# Altium PCB LR_EVM.PcbDoc
Units mm, origin at the board's own origin, x right, y up, seen from the top; angles counter-clockwise.
Board outline 90 x 62 mm, 2 copper layers (Top Layer, Bottom Layer), stack 1.571 mm thick; 63 components, 61 nets, 292 pads, 411 vias.
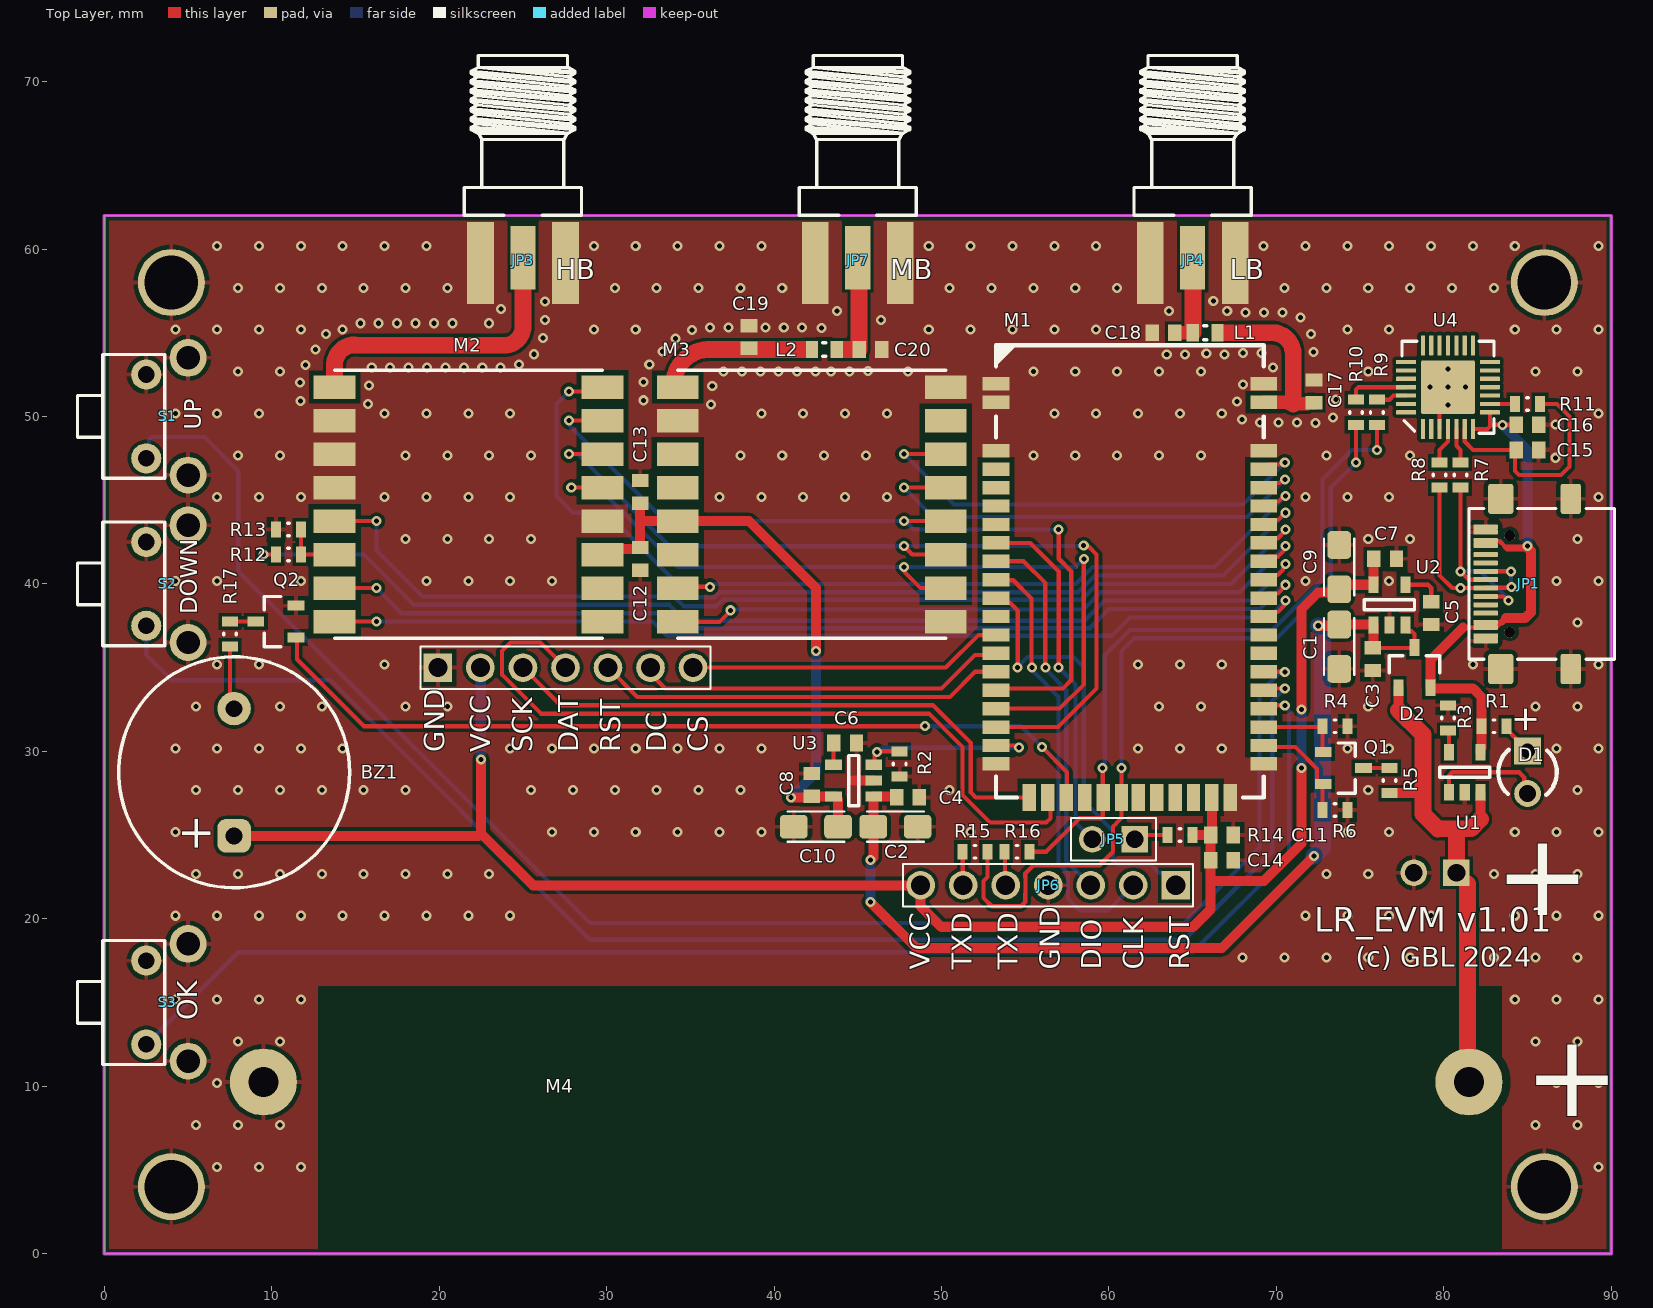
[diagram p0: Top Layer view]
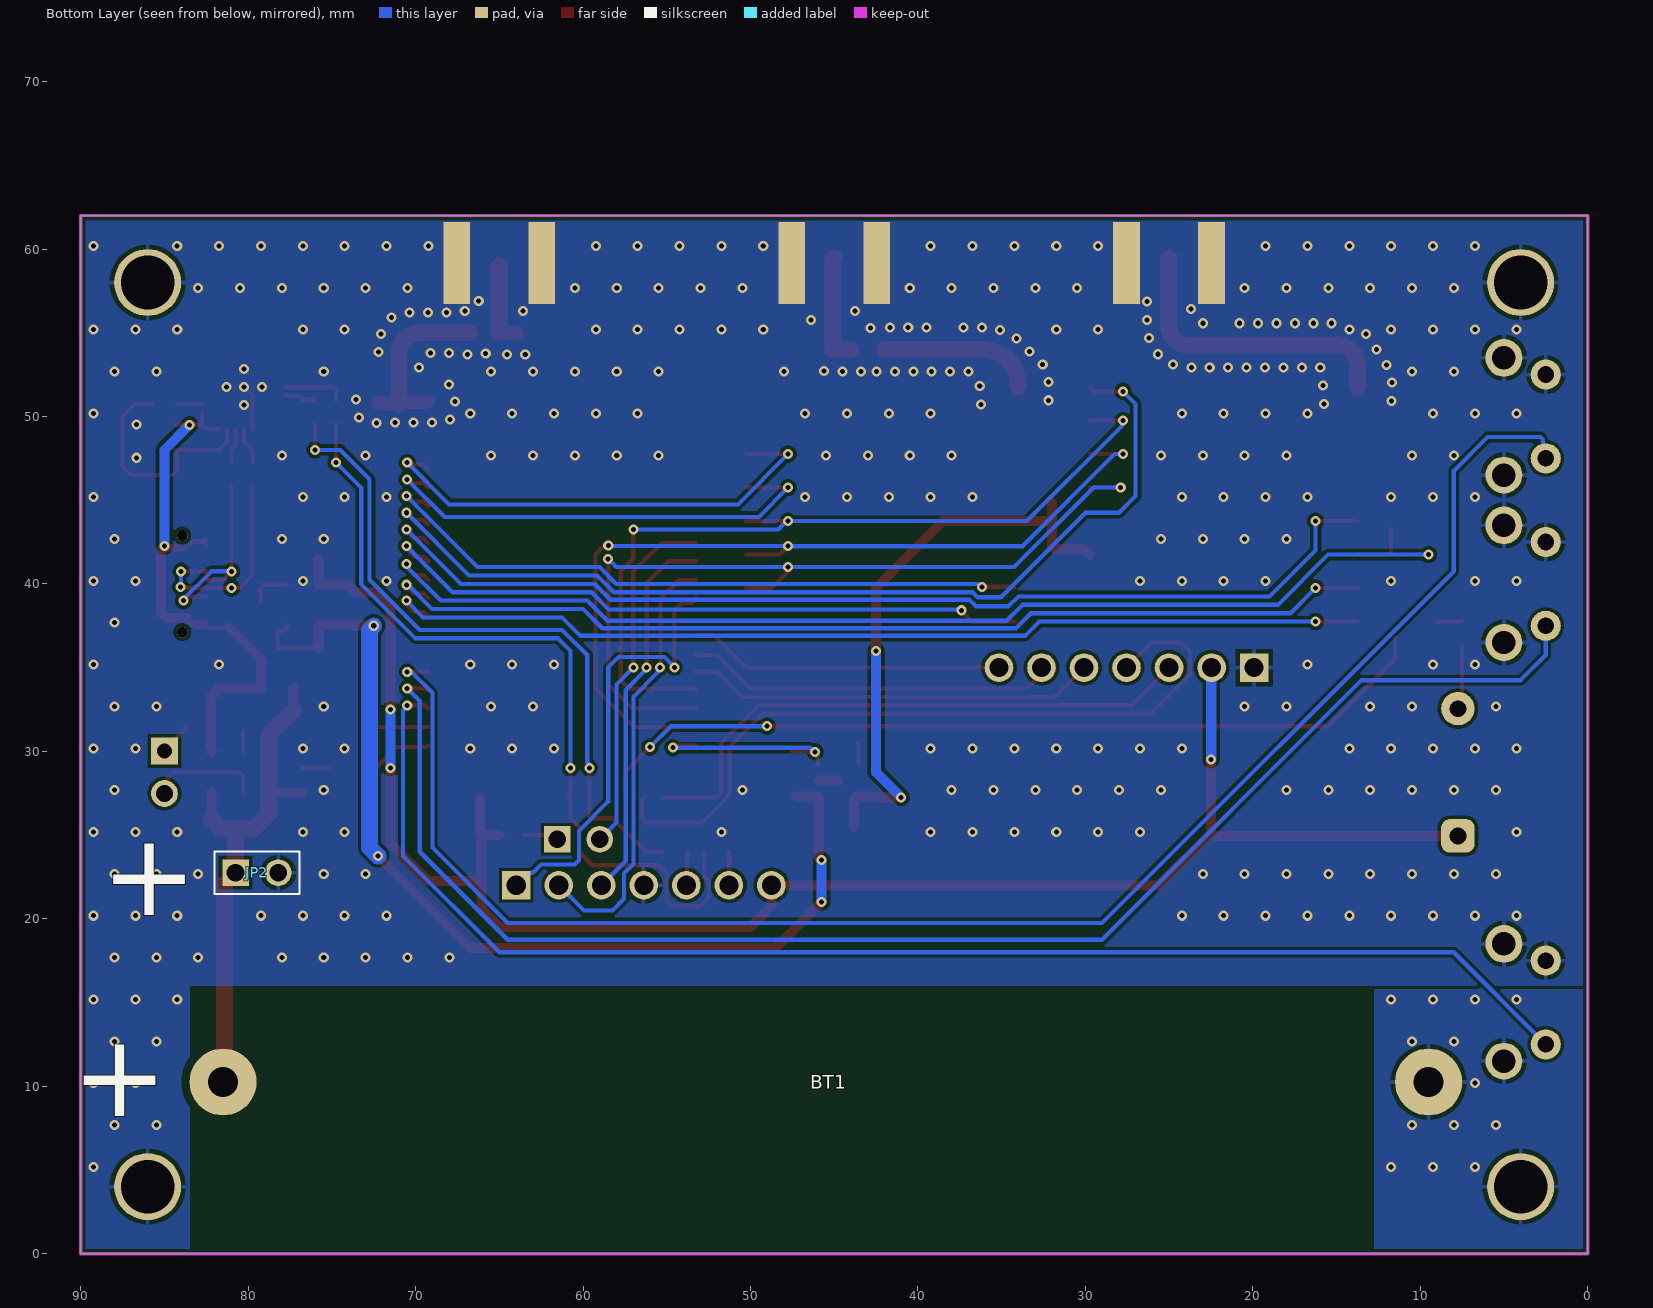
[diagram p1: Bottom Layer view, seen from below]
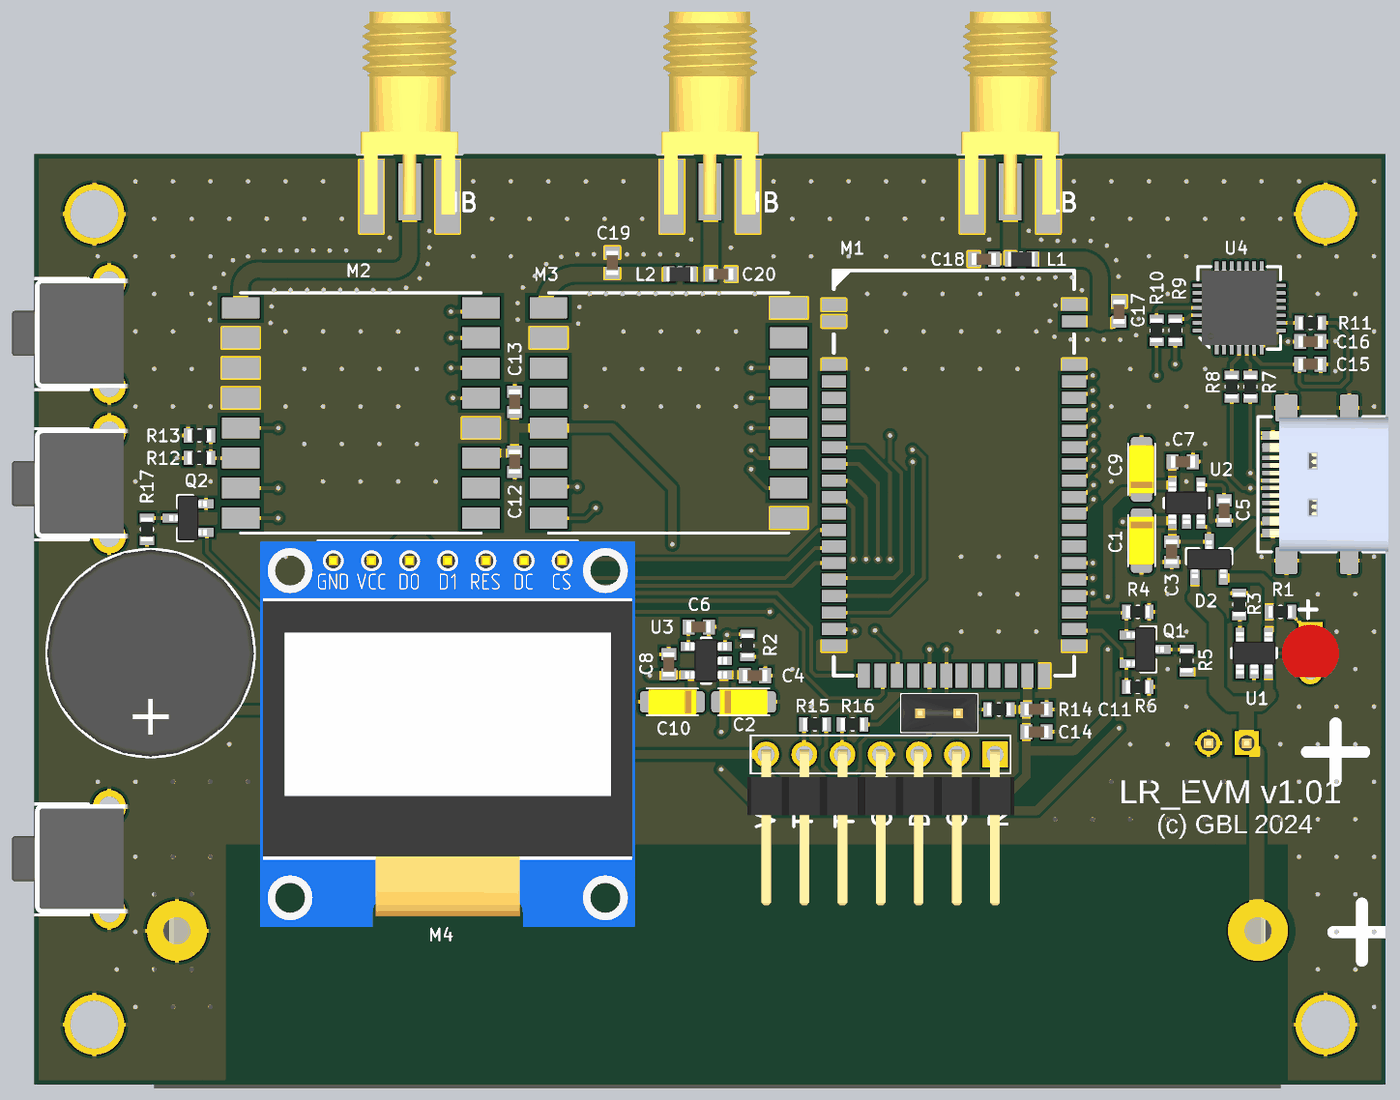
[diagram p2: 3D render of the assembled board from above, using the file's embedded part models]

## Layer stack, top to bottom
Top Solder: solder mask 0.0102, Solder Resist, Dk 3.5
Top Layer: signal copper 0.0356
Dielectric 1: dielectric 1.5, FR-4, Dk 4.8
Bottom Layer: signal copper 0.0356
Bottom Solder: solder mask 0.0102, Solder Resist, Dk 3.5

## Board outline
0,0 0,62 90,62 90,0

## Design rules (kind name [scope] priority, off if disabled: settings)
Clearance Clearance_2 [InNamedPolygon('GND_L01_P005') Or InNamedPolygon('GND_L01_P006') Or InNamedPolygon('GND_L02_P002') Or InNamedPolygon('GND_L02_P003') vs InNet('VBAT')] p1: gap=0.5 ignorepadtopadclearanceinfootprint=FALSE
Clearance Clearance_1 [InNamedPolygon('GND_L01_P001') vs InComponent('M1') or InComponent('M2') or InComponent('M3')] p2: gap=0.3 ignorepadtopadclearanceinfootprint=FALSE
Clearance [All] p3: gap=0.2 ignorepadtopadclearanceinfootprint=FALSE
HoleSize [All] p1: absolutevalues=TRUE maxlimit=5 minlimit=0.025 maxpercent=80.000 minpercent=20.000
MinimumSolderMaskSliver [All] p1: minsoldermaskwidth=0.02
PolygonConnect PolygonConnect_5 [All vs IsNamedPolygon('GND_L01_P005') Or IsNamedPolygon('GND_L01_P006') Or IsNamedPolygon('GND_L02_P002') Or IsNamedPolygon('GND_L02_P003')] p1: thpad.connectstyle=Relief thpad.reliefconductorwidth=0.254 thpad.reliefentries=4 thpad.polygonreliefangle="90 Angle" thpad.airgapwidth=0.254 smdpad.connectstyle=Relief smdpad.reliefconductorwidth=0.254 smdpad.reliefentries=4 smdpad.polygonreliefangle="90 Angle" smdpad.airgapwidth=0.254 via.connectstyle=Direct via.reliefconductorwidth=0.254 via.reliefentries=4 via.polygonreliefangle="90 Angle" via.airgapwidth=0.254
PolygonConnect PolygonConnect_4 [InComponent('JP3') or InComponent('JP4') or InComponent('JP7') vs IsNamedPolygon('GND_L02_P000')] p2: thpad.connectstyle=Relief thpad.reliefconductorwidth=0.254 thpad.reliefentries=4 thpad.polygonreliefangle="90 Angle" thpad.airgapwidth=0.254 smdpad.connectstyle=Direct smdpad.reliefconductorwidth=0.254 smdpad.reliefentries=4 smdpad.polygonreliefangle="90 Angle" smdpad.airgapwidth=0.254 via.connectstyle=Relief via.reliefconductorwidth=0.254 via.reliefentries=4 via.polygonreliefangle="90 Angle" via.airgapwidth=0.254
PolygonConnect PolygonConnect_2 [InComponent('JP3') or InComponent('JP4') or InComponent('JP7') or InComponent('M1') or InComponent('M2') or InComponent('M3') vs IsNamedPolygon('GND_L01_P001')] p3: thpad.connectstyle=Relief thpad.reliefconductorwidth=0.254 thpad.reliefentries=4 thpad.polygonreliefangle="90 Angle" thpad.airgapwidth=0.254 smdpad.connectstyle=Direct smdpad.reliefconductorwidth=0.254 smdpad.reliefentries=4 smdpad.polygonreliefangle="90 Angle" smdpad.airgapwidth=0.254 via.connectstyle=Relief via.reliefconductorwidth=0.254 via.reliefentries=4 via.polygonreliefangle="90 Angle" via.airgapwidth=0.254
PolygonConnect PolygonConnect_3 [InComponent('C17')or InComponent('C18') or InComponent('C20') or InComponent('C19') vs IsNamedPolygon('GND_L01_P001')] p4: thpad.connectstyle=Relief thpad.reliefconductorwidth=0.254 thpad.reliefentries=4 thpad.polygonreliefangle="90 Angle" thpad.airgapwidth=0.254 smdpad.connectstyle=Direct smdpad.reliefconductorwidth=0.254 smdpad.reliefentries=4 smdpad.polygonreliefangle="90 Angle" smdpad.airgapwidth=0.254 via.connectstyle=Relief via.reliefconductorwidth=0.254 via.reliefentries=4 via.polygonreliefangle="90 Angle" via.airgapwidth=0.254
PolygonConnect PolygonConnect_1 [All vs IsNamedPolygon('GND_L01_P001') Or IsNamedPolygon('GND_L02_P000')] p5: thpad.connectstyle=Relief thpad.reliefconductorwidth=0.254 thpad.reliefentries=4 thpad.polygonreliefangle="90 Angle" thpad.airgapwidth=0.254 smdpad.connectstyle=Relief smdpad.reliefconductorwidth=0.254 smdpad.reliefentries=4 smdpad.polygonreliefangle="90 Angle" smdpad.airgapwidth=0.254 via.connectstyle=Direct via.reliefconductorwidth=0.254 via.reliefentries=4 via.polygonreliefangle="90 Angle" via.airgapwidth=0.254
PolygonConnect [All] p6: connectstyle=Relief reliefconductorwidth=0.254 reliefentries=4 polygonreliefangle="90 Angle" airgapwidth=0.254
RoutingVias [All] p1: holewidth=0.711 width=1.27 viastyle="Through Hole" minholewidth=0.711 minwidth=1.27 maxholewidth=0.711 maxwidth=1.27
SilkToSilkClearance [All] p1: silktosilkclearance=0.05
SilkToSolderMaskClearance [IsPad] p1: minsilkscreentomaskgap=0.02 clearancetoexposedcopper=TRUE
SolderMaskExpansion [All] p1: expansion=0.102 istentingtop=FALSE
Width [All] p1: maxlimit=3 minlimit=0.15 preferedwidth=0.25
26 further rules are at their usual default settings.

## Components (designator, comment, footprint, x,y, rotation, side; value= is the part's Value field where it differs from the comment)
BT1 "18650" 18650 45.5,10.25 r180 bottom
BZ1 "AZ-14M40" AZ-14M40 7.75,28.75 r90 top value={Value}
C1 "22u" C_TANTAL_A 73.75,36.25 r270 top
C2 "22u" C_TANTAL_A 47.25,25.5 r0 top
C3 "100n" C-0603 75.75,35.5 r270 top
C4 "100n" C-0603 48,27.25 r0 top
C5 "nc" C-0603 79.25,38.25 r270 top
C6 "nc" C-0603 44.25,30.5 r0 top
C7 "100n" C-0603 76.5,41.5 r0 top
C8 "100n" C-0603 42.25,28 r90 top
C9 "22u" C_TANTAL_A 73.75,41 r90 top
C10 "22u" C_TANTAL_A 42.5,25.5 r180 top
C11 "1u" C-0603 66.75,25 r0 top
C12 "1n" C-0603 32,41.5 r270 top
C13 "1u" C-0603 32,45.5 r90 top
C14 "1n" C-0603 66.75,23.5 r0 top
C15 "100n" C-0603 85,48 r0 top
C16 "100n" C-0603 85,49.5 r180 top
C17 "nc" C-0603 72.25,51.5 r90 top
C18 "nc" C-0603 63.25,55 r180 top
C19 "nc" C-0603 38.5,54.75 r90 top
C20 "nc" C-0603 45.75,54 r0 top
D1 "DLED" LED_3mm_RED 85,28.75 r270 top
D2 "BAT54C" SOT-23 78.25,35 r90 top
JP1 "L-KLS1-5473" L-KLS1-5473 82.5,40 r90 top
JP2 "HEADER 2" PLS1-2 80.75,22.75 r180 bottom
JP3 "EM-SA071-GGT" SMA_F_EDGE 25,60.75 r270 top locked
JP4 "EM-SA071-GGT" SMA_F_EDGE 65,60.75 r270 top locked
JP5 "HEADER 2" PLS1-2 61.54,24.75 r180 top
JP6 "Header 7" PLS1-7R 63.99,22 r180 top
JP7 "EM-SA071-GGT" SMA_F_EDGE 45,60.75 r270 top locked
L1 "0" L-0603 65.75,55 r180 top
L2 "0" L-0603 43,54 r0 top
M1 "E78-400M22S1C" E78_400_M22S1C 61.25,40.25 r0 top locked
M2 "LORA1280" LGA16_LORA1280 21.75,44.75 r180 top locked
M3 "LORA1262-868" LGA16_LORA1280 42.25,44.75 r180 top locked
M4 "OLED0_96" OLED096 19.92,35 r0 top
Q1 "MOSF-N" SOT-23 74,29 r0 top
Q2 "MMUN2211" SOT-23 10.25,37.75 r180 top
R1 "RES" R-0603 83,31.5 r0 top
R2 "100k" R-0603 47.5,29.25 r90 top
R3 "2k" R-0603 80.25,32 r270 top
R4 "1M" R-0603 73.5,31.5 r0 top
R5 "100k" R-0603 76.75,28.25 r90 top
R6 "10k" R-0603 73.5,26.5 r0 top
R7 "22" R-0603 81,46.5 r270 top
R8 "22" R-0603 79.75,46.5 r270 top
R9 "1k" R-0603 76,50.25 r90 top
R10 "1k" R-0603 74.75,50.25 r90 top
R11 "10k" R-0603 85,50.75 r180 top
R12 "0" R-0603 11,41.75 r180 top
R13 "nc" R-0603 11,43.25 r180 top
R14 "1k" R-0603 64.25,25 r180 top
R15 "1k" R-0603 52,24 r0 top
R16 "1k" R-0603 54.5,24 r0 top
R17 "RES" R-0603 7.5,37 r90 top
S1 "KLS7-TS3602 -3 15-180" KLS7-TS3602 2.5,50 r270 top locked
S2 "KLS7-TS3602 -3 15-180" KLS7-TS3602 2.5,40 r270 top locked
S3 "KLS7-TS3602 -3 15-180" KLS7-TS3602 2.5,15 r270 top locked
U1 "MCP73831-2ATI/OT" SOT-23-5 81.25,28.75 r90 top
U2 "NCP551SN33LT1G" SOT-23-5 76.75,38.75 r90 top
U3 "NCP551SN33LT1G" SOT-23-5 44.75,28.25 r180 top
U4 "CP2102" QFN28 80.25,51.75 r90 top value={Value}

## Footprints (in the part's own frame and the unit in brackets; to place one, negate y for a bottom-side part, rotate by r counter-clockwise, add the part's x,y. Pads: shape width x height; smd on the part's side, far side on the other; paste and mask are expansions set on the pad)
18650 [mm]
  round 4 hole 1.8: 1(-36,0) 2(36,0)
  body extent -37.5,-10.5 37.5,10.5, height 21
AZ-14M40 [mm]
  rrect50% 2x2 hole 1: 1(-3.8,0)
  round 2 hole 1: 2(3.8,0)
  silkscreen extent -6.9,-6.9 6.9,6.9, body extent -6.89,-6.9 6.89,6.9, height 5.8
C-0603 [mm] "Chip Capacitor, 2-Leads, Body 1,60x0,80mm, IPC Medium Density"
  rect 0.8x1 smd: 1(-0.675,0) 2(0.675,0)
  body extent -0.8,-0.4 0.8,0.4, height 0.8
C_TANTAL_A [mm] "Capacitor, Polarized, Molded Body; 3.20 mm L X 1.65 mm W X 1.80 mm H body"
  rrect35% 1.66x1.42 smd: 1(1.325,0) 2(-1.325,0)
  silkscreen extent -1.7,-0.9 1.7,0.9, body extent -1.6,-0.82 1.6,0.82, height 1.8
E78_400_M22S1C [mm]
  rect 1.6x0.8 smd: 1(-8,11.7) 2(-8,10.6) 3(-8,7.7) 4(-8,6.6) 5(-8,5.5) 6(-8,4.4) 7(-8,3.3) 8(-8,2.2) 9(-8,1.1) 10(-8,0) 11(-8,-1.1) 12(-8,-2.2) 13(-8,-3.3) 14(-8,-4.4) 15(-8,-5.5) 16(-8,-6.6) 17(-8,-7.7) 18(-8,-8.8) 19(-8,-9.9) 20(-8,-11) 33(8,-11) 34(8,-9.9) 35(8,-8.8) 36(8,-7.7) 37(8,-6.6) 38(8,-5.5) 39(8,-4.4) 40(8,-3.3) 41(8,-2.2) 42(8,-1.1) 43(8,0) 44(8,1.1) 45(8,2.2) 46(8,3.3) 47(8,4.4) 48(8,5.5) 49(8,6.6) 50(8,7.7) 51(8,10.6) 52(8,11.7)
  rect 0.8x1.6 smd: 21(-6,-13) 22(-4.9,-13) 23(-3.8,-13) 24(-2.7,-13) 25(-1.6,-13) 26(-0.5,-13) 27(0.5,-13) 28(1.6,-13) 29(2.7,-13) 30(3.8,-13) 31(4.9,-13) 32(6,-13)
  silkscreen extent -8,-13 8,14, body extent -8,-13 8,13, height 2.8
KLS7-TS3602 [mm] "miniature switch"
  round 1.8 hole 1: 1(-2.5,0) 2(2.5,0)
  oval 2.25x2.2 hole 1.4: 3(-3.5,2.5)
  round 2.2 hole 1.4: 3(3.5,2.5)
  silkscreen extent -3.7,-4.1 3.7,1.1, body extent -3.7,-3.97 3.6,3.75, height 4.4
L-0603 [mm] "Chip Inductor, 2-Leads, Body 1,60x0,80mm, IPC Medium Density"
  rect 0.74x1.02 smd: 1(-0.735,0) 2(0.735,0)
  silkscreen extent -0.1,-0.41 0.1,0.41, body extent -0.9,-0.5 0.9,0.5, height 1
L-KLS1-5473 [mm] "USB 3.1 Type C"
  rrect20% 1.8x1.2 smd mask+0.07: 1(-5.08,-5.08) 1(5.08,-5.08)
  rrect20% 1.8x1.5 smd mask+0.07: 1(-5.08,-0.9) 1(5.08,-0.9)
  rrect30% 0.3x1.45 smd paste-2 mask+0.07: A1(-3.1,0) A4(-2.6,0) A9(2.6,0) A12(3.4,0) B1(3.1,0) B4(2.3,0) B9(-2.3,0) B12(-3.4,0)
  rrect30% 0.3x1.45 smd mask+0.07: A5(-1.25,0) A6(-0.25,0) A7(0.25,0) A8(1.25,0) B5(1.75,0) B6(0.75,0) B7(-0.75,0) B8(-1.75,0)
  round 0.65 hole 0.65 unplated paste-2539.97 mask+0.07: MH(-2.885,-1.44) MH(2.885,-1.44)
  silkscreen extent -4.5,-7.69 4.5,1, body extent -4.47,-7.7 4.47,0.2, height 3.2
LED_3mm_RED [mm]
  rect 1.6x1.6 hole 0.9: 1(-1.27,0)
  round 1.6 hole 1: 2(1.27,0)
  silkscreen extent -1.34,-1.75 1.34,1.75, body extent -1.9,-1.9 1.6,1.9, height 5.75
LGA16_LORA1280 [mm]
  rect 2.5x1.4 smd: 1(-8,7) 2(-8,5) 3(-8,3) 4(-8,1) 5(-8,-1) 6(-8,-3) 7(-8,-5) 8(-8,-7) 9(8,-7) 10(8,-5) 11(8,-3) 12(8,-1) 13(8,1) 14(8,3) 15(8,5) 16(8,7)
  silkscreen extent -8,-8 8,8, body extent -7.5,-7.51 7.5,7.51, height 1.5
OLED096 [mm] "Header, Vertical, 2.54 mm pitch; 0.70 mm lead width, 7 pins, 1 row, 7 pins per row, 16.51 mm L X 2.54 mm W X 7.54 mm H body"
  rect 1.71x1.71 hole 1.14 paste-2539.97: 1(0,0)
  round 1.71 hole 1.14 paste-2539.97: 2(2.54,0) 3(5.08,0) 4(7.62,0) 5(10.16,0) 6(12.7,0) 7(15.24,0)
  silkscreen extent -1.04,-1.27 16.28,1.27, body extent -4.88,-24.5 20.12,1.2, height 6.54
PLS1-2 [mm] "Header, Vertical, 2.54 mm pitch; 0.64 mm lead width, 2 pins, 1 row, 2 pins per row, 5.08 mm L X 2.54 mm W X 8.54 mm H body"
  rect 1.59x1.59 hole 1.06 paste-2539.97: 1(0,0)
  round 1.59 hole 1.06 paste-2539.97: 2(2.54,0)
  silkscreen extent -1.27,-1.27 3.81,1.27, body extent -1.27,-1.27 3.81,1.27, height 8.54
PLS1-7R [mm] "Header, Vertical, 2.54 mm pitch; 0.70 mm lead width, 7 pins, 1 row, 7 pins per row, 16.51 mm L X 2.54 mm W X 7.54 mm H body"
  rect 1.71x1.71 hole 1.14 paste-2539.97: 1(0,0)
  round 1.71 hole 1.14 paste-2539.97: 2(2.54,0) 3(5.08,0) 4(7.62,0) 5(10.16,0) 6(12.7,0) 7(15.24,0)
  silkscreen extent -1.04,-1.27 16.28,1.27, body extent -1.27,-0.32 16.51,10.04, height 2.54
QFN28 [mm]
  rrect20% 1.2x0.25 smd: 1(-2.5,1.5) 2(-2.5,1) 3(-2.5,0.5) 4(-2.5,0) 5(-2.5,-0.5) 6(-2.5,-1) 7(-2.5,-1.5) 15(2.5,-1.5) 16(2.5,-1) 17(2.5,-0.5) 18(2.5,0) 19(2.5,0.5) 20(2.5,1) 21(2.5,1.5)
  rrect20% 0.25x1.2 smd: 8(-1.5,-2.5) 9(-1,-2.5) 10(-0.5,-2.5) 11(0,-2.5) 12(0.5,-2.5) 13(1,-2.5) 14(1.5,-2.5) 22(1.5,2.5) 23(1,2.5) 24(0.5,2.5) 25(0,2.5) 26(-0.5,2.5) 27(-1,2.5) 28(-1.5,2.5)
  rrect5% 3.2x3.2 smd paste-4: 29(0,0)
  silkscreen extent -2.75,-2.75 2.75,2.75, body extent -2.5,-2.5 2.5,2.5, height 1
R-0603 [mm] "Chip Resistor, 2-Leads, Body 1,60x0,82mm, IPC Medium Density"
  rect 0.6x0.95 smd: 1(-0.75,0) 2(0.75,0)
  silkscreen extent -0.05,-0.38 0.05,0.38, body extent -0.8,-0.4 0.8,0.4, height 0.45
SMA_F_EDGE [mm] "SMA End Launch Jack for 1.58mm PCB, 50 Ohm, Flat Tab Contact"
  rect 3.81x1.5 smd: 1(1.27,0)
  rect 4.9x1.6 smd: 2(1.575,2.54) 2(1.575,-2.54)
  rect 4.9x1.6 smd far side: 2(1.575,2.54) 2(1.575,-2.54)
  silkscreen extent -10.81,-3.5 -1.28,3.5, body extent -10.73,-3.25 2.77,3.25, height 3.7
SOT-23 [mm]
  rect 1x0.6 smd: 1(-1.2,0.95) 2(-1.2,-0.95) 3(1.2,0)
  silkscreen extent -0.3,-1.5 0.7,1.5, body extent -1.25,-1.5 1.25,1.5, height 1.2
SOT-23-5 [mm] "SOT23, 5-Leads, Body 2,90x2,45mm, Pitch 0,95mm, IPC Medium Density"
  rect 1x0.6 smd: 1(-1.2,0.95) 2(-1.2,0) 3(-1.2,-0.95) 4(1.2,-0.95) 5(1.2,0.95)
  silkscreen extent -0.3,-1.5 0.3,1.5, body extent -1.4,-1.45 1.4,1.45, height 1.55

## Part data
BT1: library part Battery, "Multicell Battery", LatestRevisionDate=17-Jul-2002, LatestRevisionNote="Re-released for DXP Platform.", PackageDescription="Battery; 2 Leads", PackageReference=BAT-2, Published=24-Mar-1999, Publisher="Altium Limited"
BZ1: library part BUZ-AZ-14M40, Mounting  Method=THT
C1 C2 C9 C10: library part CAPP, Voltage=16V, Вид=Конденсатор
C3 C4 C5 C6 C7 C8 C11 C12 C13 C14 C15 C16 C17 C18 C19 C20: library part CAPN, Voltage=50V, Вид=Конденсатор, Точність/група=NP0
JP3 JP4 JP7: library part SMA, "SMA Female R/A PCB Mount", Вид=Роз'єм
JP6: "Header, 7-Pin", LatestRevisionDate=17-Jul-2002, LatestRevisionNote="Re-released for DXP Platform.", Publisher="Altium Limited"
L1 L2: library part L, Вид=Індуктивність
M3: library part LORA1262
R2 R3 R4 R5 R6 R7 R8 R9 R10 R11 R12 R13 R14 R15 R16: library part RES, Вид=Резистор, Точність/група=5%
S1 S2 S3: library part SW-1, Вид=Кнопка
U1: library part MCP73831
U2 U3: library part LP2980, "50mA Low-Dropout Regulator", Вид=Мікросхема
D1: Вид=Світлодіод
D2: Вид=Діод
JP1 U4: Mounting  Method=SMD
JP2 JP5: Вид=Роз'єм
Q1 Q2: Вид=Транзистор
R1 R17: Вид=Резистор, Точність/група=5%

## Free pads (board coordinates)
  round 4 hole 3.2: 0(4,4) 0(4,58) 0(86,4) 0(86,58)

## Via types
v1: diameter 0.6, hole 0.3, Top Layer to Bottom Layer, tented both sides, 406 vias
v2: diameter 0.6, hole 0.3, Top Layer to Bottom Layer, 5 vias

## Nets (pads, with @x,y where several pads share a name; then routed paths per layer and width w, separated by ;. In a path a pad name is that pad's centre, name@x,y a point inside that pad or via, vN(x,y) a via of type N, cw(c..) or ccw(c..) an arc to the next point about the centre after c; other vN are vias at no path point)
\: M1.36 S3.2 | length 83.3
  Top Layer w0.25: M1.36 69.45,32.75 v1(70.5,32.75)
  Bottom Layer w0.25: S3.2 8,18 65,18 70.75,23.75 70.75,32.429 70.5,32.679 v1(70.5,32.75)
BATT_LEVEL: M1.34 Q1.2 R6.1 | length 6.5
  Top Layer w0.25: M1.34 69.35,30.25 71.134,30.25 72.425,28.959 72.425,28.225 72.6,28.05 Q1.2 72.75,28 R6.1
BATT_MEAS: M1.35 Q1.1 R4.1 | length 5.1
  Top Layer w0.25: M1.35 72.7,31.45 R4.1 72.75,30 Q1.1
BOOT: JP5.2 M1.8 | length 21.3
  Top Layer w0.25: M1.8 55.3,42.45 57,40.75 v1(57,35)
  Bottom Layer w0.25: v1(57,35) 58,34 58,25.75 JP5.2
BUSY1262: M1.44 M3.16 | length 40
  Top Layer w0.25: M3.16 34.8,37.75 34.818,37.732 36.732,37.732 37.39,38.39 v1(37.39,38.425) ; M1.44 69.525,41.625 70.085,41.625 70.483,42.023 70.483,42.183 v1(70.55,42.25)
  Bottom Layer w0.25: v1(37.39,38.425) 37.434,38.469 58.469,38.469 59.5,39.5 67.8,39.5 v1(70.55,42.25)
BUSY1280: M1.42 M2.15 | length 60.5
  Top Layer w0.25: M2.15 v1(16.25,39.75) ; M1.42 69.525,39.425 70.085,39.425 70.555,39.895 v1(70.555,39.948)
  Bottom Layer w0.25: v1(16.25,39.75) 17.75,38.25 33.25,38.25 34.15,37.35 58.85,37.35 60,38.5 69.012,38.5 70.46,39.948 v1(70.555,39.948)
BUZZ: M1.23 Q2.1 | length 51.6
  Top Layer w0.25: Q2.1 11.5,36.75 11.5,35.5 15.5,31.5 v1(49,31.5) ; v1(56,30.25) 57.5,28.75 57.5,27.3 M1.23
  Bottom Layer w0.25: v1(49,31.5) 54.75,31.5 v1(56,30.25)
DM: JP1.A7 JP1.B7 R7.2 | length 11.8
  Top Layer w0.25: R7.2 v1(81,40.75) 81.5,40.25 JP1.A7 ; JP1.B7 83.551,39.25 83.805,38.997 v1(83.86,38.997)
  Bottom Layer w0.25: v1(81,40.75) 82.2,40.75 83.86,39.09 v1(83.86,38.997)
DOWN: M1.37 S2.2 | length 89.6
  Top Layer w0.25: M1.37 69.35,33.75 v1(70.5,33.75)
  Bottom Layer w0.25: S2.2 2.5,35.75 4,34.25 13.5,34.25 29,18.75 64.5,18.75 69.75,24 69.75,33 v1(70.5,33.75)
DP: JP1.A6 JP1.B6 R8.2 | length 12.3
  Top Layer w0.25: R8.2 79.75,40.5 80.5,39.75 v1(81,39.75) JP1.A6 82.523,39.773 83.993,39.773 v1(84.03,39.811) ; JP1.B6 v1(84,40.75)
  Bottom Layer w0.25: v1(84,40.75) 84.015,40.735 84.015,39.826 v1(84.03,39.811)
EXTRF: M1.19 R2.2 U3.3 | length 12.3
  Top Layer w0.25: U3.3 46,29.25 46,29.75 46.25,30 R2.2 ; M1.19 54.65,30.35 v1@54.75,30.25
  Bottom Layer w0.25: v1(46.14,29.969) 46.212,29.969 46.462,30.219 v1(54.64,30.219)
GND: BT1.2 C1.1 C2.1 C3.2 C4.2 C5.2 C6.2 C7.2 C8.2 C9.1 C10.1 C11.2 C12.2 C13.2 C14.2 C15.2 C16.1 C17.2 C18.2 C19.2 C20.2 JP1.1 JP1.A1 JP1.A12 JP1.B1 JP1.B12 JP2.2 JP3.2 JP4.2 JP6.4 JP7.2 M1.1 M1.2 M1.3 M1.20 M1.32 M1.33 M1.50 M1.52 M2.4 M2.10 M2.11 M2.12 M3.1 M3.8 M3.10 M4.1 pad.0 Q2.2 R2.1 R3.1 R4.2 R6.2 R13.2 S1.1 S1.3 S2.1 S2.3 S3.1 S3.3 U1.2 U2.2 U3.2 U4.3 U4.29 | length 3.9
  Top Layer w0.25: U4.3 79.75,51.25 v2(80.25,51.75)
  Top Layer w0.6: 44.75,28.25 U3.2
  other v1: 6.737,5.181 9.237,5.181 11.737,5.181 89.237,5.181 5.487,7.681 7.987,7.681 10.487,7.681 85.487,7.681 87.987,7.681 6.737,10.181 86.737,10.181 89.237,10.181 7.987,12.681 10.487,12.681 85.487,12.681 87.987,12.681 4.237,15.181 6.737,15.181 9.237,15.181 11.737,15.181 84.237,15.181 86.737,15.181 89.237,15.181 67.987,17.681 70.487,17.681 72.987,17.681 75.487,17.681 77.987,17.681 82.987,17.681 85.487,17.681 87.987,17.681 4.237,20.181 6.737,20.181 9.237,20.181 11.737,20.181 14.237,20.181 16.737,20.181 19.237,20.181 21.737,20.181 24.237,20.181 71.737,20.181 74.237,20.181 76.737,20.181 79.237,20.181 84.237,20.181 86.737,20.181 89.237,20.181 5.487,22.681 7.987,22.681 10.487,22.681 12.987,22.681 15.487,22.681 17.987,22.681 20.487,22.681 22.987,22.681 72.987,22.681 75.487,22.681 82.987,22.681 85.487,22.681 87.987,22.681 4.237,25.181 26.737,25.181 29.237,25.181 31.737,25.181 34.237,25.181 36.737,25.181 39.237,25.181 51.737,25.181 74.237,25.181 76.737,25.181 84.237,25.181 86.737,25.181 89.237,25.181 5.487,27.681 7.987,27.681 10.487,27.681 12.987,27.681 15.487,27.681 17.987,27.681 25.487,27.681 27.987,27.681 30.487,27.681 32.987,27.681 35.487,27.681 37.987,27.681 50.487,27.681 75.487,27.681 87.987,27.681 4.237,30.181 6.737,30.181 9.237,30.181 11.737,30.181 14.237,30.181 24.237,30.181 26.737,30.181 29.237,30.181 31.737,30.181 34.237,30.181 36.737,30.181 39.237,30.181 61.737,30.181 64.237,30.181 66.737,30.181 74.237,30.181 76.737,30.181 86.737,30.181 89.237,30.181 5.487,32.681 10.487,32.681 12.987,32.681 17.987,32.681 20.487,32.681 62.987,32.681 65.487,32.681 75.487,32.681 85.487,32.681 87.987,32.681 6.737,35.181 9.237,35.181 16.737,35.181 61.737,35.181 64.237,35.181 66.737,35.181 81.737,35.181 89.237,35.181 87.987,37.681 4.237,40.181 6.737,40.181 11.737,40.181 19.237,40.181 21.737,40.181 24.237,40.181 26.737,40.181 71.737,40.181 76.737,40.181 86.737,40.181 89.237,40.181 17.987,42.681 20.487,42.681 22.987,42.681 25.487,42.681 75.487,42.681 77.987,42.681 87.987,42.681 6.737,45.181 9.237,45.181 11.737,45.181 16.737,45.181 19.237,45.181 21.737,45.181 24.237,45.181 36.737,45.181 39.237,45.181 41.737,45.181 44.237,45.181 46.737,45.181 71.737,45.181 74.237,45.181 76.737,45.181 89.237,45.181 86.657,47.533 7.987,47.681 10.487,47.681 17.987,47.681 20.487,47.681 22.987,47.681 25.487,47.681 37.987,47.681 40.487,47.681 42.987,47.681 45.487,47.681 55.487,47.681 57.987,47.681 60.487,47.681 62.987,47.681 65.487,47.681 72.987,47.681 77.987,47.681 86.657,49.533 72.332,49.618 69.033,49.643 70.133,49.635 71.233,49.635 67.948,49.827 73.385,49.938 4.237,50.181 6.737,50.181 9.237,50.181 16.737,50.181 19.237,50.181 21.737,50.181 24.237,50.181 39.237,50.181 41.737,50.181 44.237,50.181 46.737,50.181 56.737,50.181 59.237,50.181 61.737,50.181 64.237,50.181 66.737,50.181 89.237,50.181 36.226,50.713 15.741,50.748 67.643,50.884 11.708,50.935 32.204,50.967 73.557,51.025 36.307,51.81 15.807,51.846 68.01,51.921 11.693,52.035 32.193,52.067 7.987,52.681 10.487,52.681 47.987,52.681 55.487,52.681 57.987,52.681 60.487,52.681 62.987,52.681 65.487,52.681 75.487,52.681 85.487,52.681 87.987,52.681 36.976,52.683 38.076,52.683 39.176,52.683 40.276,52.683 41.376,52.683 42.476,52.683 43.409,52.683 44.509,52.683 45.609,52.711 15.971,52.933 17.071,52.933 18.171,52.933 19.271,52.933 20.371,52.933 21.471,52.933 22.571,52.933 23.671,52.933 69.785,52.92 12.016,53.087 24.758,53.098 32.545,53.109 64.551,53.695 66.91,53.69 25.668,53.716 63.451,53.703 65.812,53.75 68.006,53.785 69.106,53.785 72.215,53.837 33.332,53.878 12.615,54.009 34.108,54.657 26.211,54.673 13.238,54.916 72.056,54.925 35.09,55.154 4.237,55.181 6.737,55.181 9.237,55.181 11.737,55.181 14.237,55.181 29.237,55.181 31.737,55.181 49.237,55.181 51.737,55.181 54.237,55.181 56.737,55.181 59.237,55.181 74.237,55.181 76.737,55.181 84.237,55.181 86.737,55.181 89.237,55.181 42.844,55.289 36.178,55.317 37.278,55.317 39.478,55.317 40.578,55.317 41.678,55.317 15.286,55.567 16.386,55.567 17.486,55.567 18.586,55.567 19.686,55.567 20.786,55.567 22.986,55.567 46.392,55.754 26.317,55.768 71.434,55.901 70.361,56.203 68.161,56.215 69.261,56.215 43.758,56.308 63.596,56.307 67.064,56.289 23.683,56.418 26.317,56.868 66.23,56.891 7.987,57.681 10.487,57.681 12.987,57.681 15.487,57.681 17.987,57.681 20.487,57.681 30.487,57.681 32.987,57.681 35.487,57.681 37.987,57.681 40.487,57.681 50.487,57.681 52.987,57.681 55.487,57.681 57.987,57.681 60.487,57.681 70.487,57.681 72.987,57.681 75.487,57.681 77.987,57.681 80.487,57.681 82.987,57.681 6.737,60.181 9.237,60.181 11.737,60.181 14.237,60.181 16.737,60.181 19.237,60.181 29.237,60.181 31.737,60.181 34.237,60.181 36.737,60.181 39.237,60.181 49.237,60.181 51.737,60.181 54.237,60.181 56.737,60.181 59.237,60.181 69.237,60.181 71.737,60.181 74.237,60.181 76.737,60.181 79.237,60.181 81.737,60.181 84.237,60.181 89.237,60.181
  other v2: 80.25,50.675 79.175,51.75 81.3,51.75 80.25,52.825
INT1262: M1.47 M3.15 | length 40.1
  Top Layer w0.25: M3.15 34.326,39.826 v1(36.174,39.826) ; M1.47 69.525,44.925 70.127,44.925 70.443,45.242 v1(70.538,45.242)
  Bottom Layer w0.25: v1(36.174,39.826) 36.269,39.826 36.443,40 58.014,40 59.014,41 66.297,41 v1(70.538,45.242)
INT1280: M1.41 M2.16 | length 59.8
  Top Layer w0.25: M2.16 v1(16.25,37.75) ; M1.41 69.525,38.325 70.085,38.325 70.483,38.723 70.483,38.933 v1(70.55,39)
  Bottom Layer w0.25: v1(16.25,37.75) 32.75,37.75 33.6,36.9 60.15,36.9 61.25,38 69.55,38 v1(70.55,39)
MISO: M1.17 M2.5 M3.2 | length 51.2
  Top Layer w0.25: v1(27.887,45.75) M2.5 ; v1(47.75,41) 47.817,40.933 47.817,40.683 48.75,39.75 M3.2 ; M1.17 57.05,32.55 58.5,34 v1(58.5,41.489)
  Bottom Layer w0.25: v1(27.887,45.75) 29.5,45.75 34.25,41 v1(47.75,41) 58.011,41 v1(58.5,41.489)
MOSI: M1.18 M2.6 M3.3 | length 53.7
  Top Layer w0.25: v1(27.75,47.75) M2.6 ; v1(47.75,42.25) 48.25,41.75 M3.3 ; M1.18 56.95,31.45 59.254,33.754 59.254,41.76 58.791,42.223 58.56,42.223 v1(58.493,42.289)
  Bottom Layer w0.25: v1(27.75,47.75) 28.25,47.75 33.75,42.25 v1(47.75,42.25) 47.769,42.269 58.474,42.269 v1(58.493,42.289)
NetBZ1_2: BZ1.2 R17.1 | length 3.8
  Top Layer w0.25: R17.1 7.5,32.8 BZ1.2
NetC5_1: C5.1 U2.4 | length 2.5
  Top Layer w0.25: U2.4 79.05,39.95 79.25,39.75 C5.1
NetC6_1: C6.1 U3.4 | length 1.3
  Top Layer w0.25: U3.4 43.55,30.475 C6.1
NetC15_1: C15.1 R11.1 U4.6 | length 13.9
  Top Layer w0.25: U4.6 81.252,49.248 81.252,48.498 81.75,48 C15.1 84.25,47.925 84.25,46.75 84.5,46.5 87,46.5 87.5,47 87.5,50 86.75,50.75 R11.1
NetC17_1: C17.1 L1.1 M1.51 | length 11.4
  Top Layer w0.8: M1.51 70.65,50.85 70.75,50.75 71,50.75 71.841,50.75 71.916,50.825 C17.1
  Top Layer w1: L1.1@66.737,55 69.75,55 ; 70,55 69.75,55 ; 71,50.75 71,53.83 ; 71,53.75 ccw(c69.75,53.75) 69.75,55
NetC18_1: C18.1 JP4.1 L1.2 | length 5.1
  Top Layer w0.25: JP4.1@65,59 JP4.1@65.015,58.985
  Top Layer w0.8: C18.1 L1.2
  Top Layer w1: L1.2 JP4.1@65.015,58.985
NetC19_1: C19.1 L2.1 M3.9 | length 9.2
  Top Layer w1: M3.9@34,51.75 cw(c36.129,51.871) 36.008,54 C19.1@38.425,54 ; C19.1@38.575,54 L2.1@42,54
NetC20_1: C20.1 JP7.1 L2.2 | length 6.6
  Top Layer w1: L2.2@44,54 C20.1 45.075,59.405 JP7.1
NetD1_1: D1.1 R1.2 | length 2
  Top Layer w0.25: R1.2 83.75,31.325 84.327,30.748 84.327,30.693 D1.1
NetD1_2: D1.2 U1.1 | length 6.8
  Top Layer w0.25: U1.1 80.3,28.55 80.5,28.75 84.5,28.75 84.804,28.446 84.804,27.676 D1.2
NetJP3_1: JP3.1 M2.9 | length 18.3
  Top Layer w0.8: 13.75,53.15 cw(c14.55,53.148) 13.765,53.301 ; 15.138,54.259 ccw(c15.259,55.05) 15.256,54.25
  Top Layer w1: M2.9 13.75,53.15 ; 13.765,53.301 cw(c14.948,53.069) 15.138,54.259 ; 15.256,54.25 24,54.25 ccw(c23.875,55.375) 25,55.5 ; 25,55.25 JP3.1
NetJP5_1: JP5.1 R14.2 | length 2.1
  Top Layer w0.25: JP5.1 61.79,25 R14.2
NetJP6_5: JP6.5 R16.1 | length 2
  Top Layer w0.25: R16.1 53.79,23.96 53.79,22.04 JP6.5
NetJP6_6: JP6.6 R15.1 | length 2
  Top Layer w0.25: R15.1 51.27,23.98 51.27,22.02 JP6.6
NetM2_14: M2.14 R12.1 R13.1 | length 3.5
  Top Layer w0.25: R13.1 R12.1 M2.14
NetQ1_3: Q1.3 R5.2 | length 1.6
  Top Layer w0.25: Q1.3 R5.2
NetQ2_3: Q2.3 R17.2 | length 1.6
  Top Layer w0.25: R17.2 Q2.3
NetR3_2: R3.2 U1.5 | length 1.3
  Top Layer w0.25: R3.2 80.3,31.2 U1.5
NetR7_1: R7.1 U4.5 | length 2.1
  Top Layer w0.25: U4.5 80.75,48.25 81,48 R7.1
NetR8_1: R8.1 U4.4 | length 2.2
  Top Layer w0.25: R8.1 79.75,48 80.248,48.498 80.248,49.248 U4.4
NetR9_2: R9.2 U4.26 | length 1.9
  Top Layer w0.25: R9.2 76.75,51 77,51.25 U4.26
NetR10_2: R10.2 U4.25 | length 3.7
  Top Layer w0.25: R10.2 74.75,51.601 74.899,51.75 U4.25
NetR11_2: R11.2 U4.9 | length 1.5
  Top Layer w0.25: U4.9 R11.2
NRST: JP6.1 M1.11 | length 26.1
  Top Layer w0.25: M1.11 53.523,38.877 54.085,38.877 54.55,38.412 v1(54.55,35)
  Bottom Layer w0.25: v1(54.55,35) 54.55,35.037 55.14,35.627 57.873,35.627 58.5,35 58.5,27 60.25,25.25 60.25,23.5 60.5,23.25 62.5,23.25 63,22.75 63.113,22.75 63.135,22.728 63.262,22.728 JP6.1
NSS1262: M1.48 M3.5 | length 28.4
  Top Layer w0.25: v1(47.75,45.75) M3.5 ; M1.48 69.525,46.025 70.19,46.025 70.412,46.247 v1(70.507,46.247)
  Bottom Layer w0.25: v1(47.75,45.75) 49.5,44 68.26,44 v1(70.507,46.247)
NSS1280: M1.46 M2.8 | length 58.4
  Top Layer w0.25: v1(27.75,51.5) 29.5,51.5 M2.8 ; M1.46 69.525,43.825 70.085,43.825 70.51,44.25 v1(70.55,44.25)
  Bottom Layer w0.25: v1(27.75,51.5) 27,50.75 27,45.25 28,44.25 30,44.25 35.051,39.199 36.434,39.199 36.735,39.5 58.156,39.5 59.156,40.5 66.8,40.5 v1(70.55,44.25)
OLED_CS: M1.13 M4.7 | length 18.9
  Top Layer w0.25: M4.7 50.25,35 52.2,36.95 M1.13
OLED_DATA: M1.22 M4.4 | length 45.5
  Top Layer w0.25: M4.4 26.04,36.5 24.25,36.5 23.75,36 23.75,34.578 26.078,32.25 49.25,32.25 51.25,30.25 51.25,27.402 52.902,25.75 56.25,25.75 56.5,26 56.5,27.1 M1.22
OLED_DC: M1.14 M4.6 | length 22.2
  Top Layer w0.25: M4.6 32.62,34.63 33.5,33.75 50,33.75 52,35.75 53.15,35.75 M1.14
OLED_RST: M1.15 M4.5 | length 24.5
  Top Layer w0.25: M4.5 31.83,33.25 50.5,33.25 52,34.75 M1.15
OLED_SCK: M1.21 M4.3 | length 35.2
  Top Layer w0.25: M4.3 27.25,32.75 49.5,32.75 51.75,30.5 51.75,27.544 52.044,27.25 M1.21
RST1262: M1.49 M3.6 | length 28.9
  Top Layer w0.25: v1(47.75,47.75) M3.6 ; M1.49 69.525,47.125 70.28,47.125 70.405,47.25 v1(70.5,47.25)
  Bottom Layer w0.25: v1(47.75,47.75) 50.75,44.75 68,44.75 v1(70.5,47.25)
RST1280: M1.45 M2.13 | length 63.5
  Top Layer w0.25: M2.13 v1(16.25,43.75) ; M1.45 69.525,42.725 70.085,42.725 70.55,43.19 v1(70.55,43.25)
  Bottom Layer w0.25: v1(16.25,43.75) 16.25,42 19,39.25 34,39.25 34.581,38.669 36.546,38.669 36.927,39.05 58.348,39.05 59.298,40 67.3,40 v1(70.55,43.25)
RXD: M1.25 R9.1 R16.2 | length 41.3
  Top Layer w0.25: R16.2 56.25,24 58.25,26 59.5,26 59.627,26.127 v1(59.627,29) ; v1(76,48) R9.1
  Bottom Layer w0.25: v1(59.627,29) 59.693,29.066 59.693,29.265 59.75,29.322 59.75,35.75 61.25,37.25 69.75,37.25 72.75,40.25 72.75,46.25 74.5,48 v1(76,48)
SCK: M1.16 M2.7 M3.4 | length 50.6
  Top Layer w0.25: v1(27.75,49.75) M2.7 ; v1(47.75,43.75) M3.4 ; M1.16 53.346,33.746 57.246,33.746 57.75,34.25 57.75,40.75 57,41.5 v1(57,43.25)
  Bottom Layer w0.25: v1(27.75,49.75) 27.817,49.683 27.817,49.433 33.5,43.75 v1(47.75,43.75) 47.844,43.75 48.344,43.25 v1(57,43.25)
SWCLK: JP6.2 M1.10 | length 26.2
  Top Layer w0.25: M1.10 53.282,40.218 54.282,40.218 55.377,39.123 55.377,35.023 v1(55.4,35)
  Bottom Layer w0.25: v1(55.4,35) 55.4,34.906 55.553,34.754 55.553,34.697 56.995,33.255 56.995,23.273 57.552,22.716 57.552,21.198 58.25,20.5 59.95,20.5 JP6.2
SWDIO: JP6.3 M1.9 | length 22.7
  Top Layer w0.25: M1.9 54.9,41.35 56.2,40.05 v1(56.2,35)
  Bottom Layer w0.25: v1(56.2,35) 56.2,34.913 57.449,33.664 57.449,23.461 JP6.3
TCXO_EN: M1.43 R12.2 | length 66.7
  Top Layer w0.25: v1(9.5,41.75) R12.2 ; M1.43 69.525,40.525 70.085,40.525 70.395,40.835 70.395,40.95 70.55,41.105 v1(70.55,41.2)
  Bottom Layer w0.25: v1(9.5,41.75) 15.5,41.75 18.5,38.75 33.75,38.75 34.7,37.8 58.55,37.8 59.75,39 68.5,39 70.398,40.898 70.398,40.953 70.55,41.105 v1(70.55,41.2)
TXD: M1.26 R10.1 R15.2 | length 49.8
  Top Layer w0.25: R15.2 52.75,22.5 52.5,22.25 52.5,21.25 53,20.75 54.75,20.75 55,21 55,21.498 55.012,21.51 55.012,22.488 55,22.5 55,22.698 55.5,23.198 59.448,23.198 60.25,24 60.25,25.5 60.418,25.668 60.418,25.68 60.75,26.012 M1.26 M1.26@60.75,27.523 ; v1(60.75,29) M1.26@60.75,27.523 ; M1.26@60.887,27.386 M1.26@60.75,27.523 ; v1(74.75,47.25) R10.1
  Bottom Layer w0.25: v1(60.75,29) 60.75,36 61.5,36.75 70,36.75 73.25,40 73.25,45.75 v1(74.75,47.25)
UP: M1.38 S1.2 | length 97.5
  Top Layer w0.25: M1.38 v1(70.5,34.75)
  Bottom Layer w0.25: S1.2 2.675,47.675 2.675,48.629 2.821,48.775 5.975,48.775 8,46.75 8,40.75 29,19.75 64.5,19.75 69,24.25 69,33.5 70.183,34.683 70.433,34.683 v1(70.5,34.75)
V_IN: C1.2 C2.2 C3.1 C4.1 D2.3 U2.1 U2.3 U3.1 | length 60.7
  Top Layer w0.25: U3.1@45.925,27.275 U3.1 ; C4.1@47.275,27.3 C4.1 ; C1.2@73.675,37.5 C1.2 ; U2.1@75.775,37.575 U2.1 ; C3.1@75.8,36.225 C3.1 78.225,36.175 D2.3 78.25,37 78.073,37.177 77.873,37.177 77.7,37.35 U2.3
  Top Layer w0.6: v1(45.75,21) 48.5,18.25 66.75,18.25 v1(72.25,23.75) ; v1(45.75,23.5) 45.925,23.675 C2.2 U3.1@45.925,27.275 ; U3.1 C4.1@47.275,27.3 ; v1(72.5,37.5) C1.2@73.675,37.5 ; C1.2 U2.1@75.775,37.575 ; C3.1@75.8,36.225 U2.1
  Bottom Layer w0.6: v1(45.75,21) v1(45.75,23.5)
  Bottom Layer w1: v1(72.25,23.75) 72.75,24.25 72.75,37.25 v1(72.5,37.5)
VBAT: BT1.1 D2.1 JP2.1 R5.1 U1.3 | length 31.3
  Top Layer w0.25: 79.645,25.355 79.855,25.355 79.875,25.375 ; JP2.1 JP2.1@81.418,22.082 ; BT1.1@81.418,10.332 BT1.1
  Top Layer w0.6: R5.1 78.75,27.5 ; 77.3,32.45 D2.1 ; 82.2,25.95 U1.3
  Top Layer w1: 77.3,32.45 78.75,31 78.75,27.5 78.75,26.25 79.645,25.355 ; 79.875,25.375 80.75,25.375 ; JP2.1 80.75,25.375 ; BT1.1@81.418,10.332 JP2.1@81.418,22.082 ; 82.2,25.95 81.625,25.375 80.75,25.375
VBUS: C16.2 D2.2 JP1.A4 JP1.A9 JP1.B4 JP1.B9 R1.1 U1.4 U4.7 U4.8 | length 36.2
  Top Layer w0.25: D2.2 D2.2@79.25,33.75 ; 81.15,37.4 JP1.A4 82.525,37.425 83.175,37.425 83.453,37.703 82.503,37.703 JP1.B9 ; U4.7 82.601,49.25 82.75,49.399 ; JP1.B4 82.75,42.55 83.342,42.55 83.664,42.228 ; JP1.A9 82.525,42.575 JP1.A9@82.75,42.575 ; U4.8 82.75,49.399 ; 83.639,42.203 83.775,42.067 84.933,42.067 84.765,42.235 83.671,42.235 ; C16.2 v1(83.5,49.5) 82.851,49.5 82.75,49.399 ; v1@85,42.156 v1(85,42.25)
  Top Layer w0.4: 83.453,37.703 83.7,37.95
  Top Layer w0.6: D2.2 79.2,35.45 81.15,37.4 ; D2.2@79.25,33.75 81.75,33.75 82.25,33.25 R1.1 82.25,30.2 82.2,30.15 U1.4 ; 83.7,37.95 84.849,37.95 85.2,38.301 85.2,41.956 v1@85,42.156
  Bottom Layer w0.6: v1(83.5,49.5) 85,48 v1(85,42.25)
VCC: BZ1.1 C7.1 C9.2 C11.1 C14.1 JP6.7 M1.31 M4.2 R14.1 U2.5 | length 106.4
  Top Layer w0.6: BZ1.1 22.354,24.95 22.5,25.096 ; v1(22.5,29.5) 22.5,25.096 ; R14.1 C11.1 ; M1.31 66.15,25.075 C11.1 ; v1(71.5,29) 71.5,24.5 69.25,22.25 66.075,22.25 ; v1(71.5,32.5) 71.5,38.5 72.491,39.491 73.566,39.491 74.025,39.95 U2.5 75.8,41.475 C7.1 ; 22.5,25.096 25.596,22 JP6.7 48.75,20.75 50,19.5 65,19.5 66.075,20.575 66.075,22.25 ; 66.075,22.25 C14.1 C11.1
  Bottom Layer w0.6: M4.2 22.48,34.98 22.48,29.52 v1(22.5,29.5) ; v1(71.5,29) v1(71.5,32.5)
VCC2: C8.1 C10.2 C12.1 C13.1 M2.3 M3.13 U3.5 | length 34.8
  Top Layer w0.6: M2.3 30.075,42.075 31.8,42.075 C12.1@32,42.275 ; C12.1@32,42.323 32,43.75 ; C13.1 32,43.75 ; v1(41,27.25) 42.175,27.25 C8.1 42.275,27.3 U3.5 43.652,27.3 43.825,27.127 C10.2 ; v1(42.5,36) 42.5,39.75 38.5,43.75 M3.13 32,43.75
  Bottom Layer w0.6: v1(41,27.25) 42.5,28.75 v1(42.5,36)
pads on no net: JP1.A5 JP1.A8 JP1.B5 JP1.B8 JP1.MH M1.4 M1.5 M1.6 M1.7 M1.12 M1.24 M1.27 M1.28 M1.29 M1.30 M1.39 M1.40 M2.1 M2.2 M3.7 M3.11 M3.12 M3.14 U4.1 U4.2 U4.10 U4.11 U4.12 U4.13 U4.14 U4.15 U4.16 U4.17 U4.18 U4.19 U4.20 U4.21 U4.22 U4.23 U4.24 U4.27 U4.28

## Polygon pours and split planes (outlines as drawn)
GND on Bottom Layer "GND_L02_P003" (solid, remove dead copper, pour order 3): -0.25,16.25 -0.25,0 0,-0.25 12.75,-0.25 12.75,16.25
GND on Bottom Layer "GND_L02_P002" (solid, remove dead copper, pour order 2): 83.5,16 83.5,0 90.25,0 90,0.25 90,16
GND on Bottom Layer "GND_L02_P000" (solid, remove dead copper, pour order 0): 0,16 0,62 90,62 90,16
GND on Top Layer "GND_L01_P006" (solid, remove dead copper, pour order 6): 83.5,16 83.5,0 90,0 90,16
GND on Top Layer "GND_L01_P005" (solid, remove dead copper, pour order 5): 0,16 0,0 12.75,0 12.75,16
GND on Top Layer "GND_L01_P001" (solid, remove dead copper, pour order 1): 0,16 0,61.75 0.25,62 90,62 90,16

## Keep-outs
Keep-Out Layer:
  the board outline again, w0.2

## Other copper
Top Layer:
  pour cut-out: 42.5,54.75 42.5,53.5 43.5,53.5 43.5,54.75
  pour cut-out: 65.5,55.75 66,55.75 66,54.25 65.5,54.25

## Silkscreen, mask and mechanical layers (free items; w line width, h text height)
Top Overlay:
  text "HB" at 26.95,58.2 h1.2
  text "MB" at 46.95,58.2 h1.2
  text "LB" at 67.2,58.2 h1.2
  text "UP" at 5.8,49.2 h1 r90
  text "DOWN" at 5.55,38.2 h1 r90
  text "GND" at 20.3,29.95 h1.2 r90
  text "VCC" at 23.05,29.95 h1.2 r90
  text "SCK" at 25.55,29.95 h1.2 r90
  text "DAT" at 28.3,29.95 h1.2 r90
  text "RST" at 30.8,29.95 h1.2 r90
  text "DC" at 33.55,29.95 h1.2 r90
  text "CS" at 36.05,29.95 h1.2 r90
  text "+" at 83.05,20.217 h5
  text "LR_EVM v1.01" at 72.25,18.75 h2.5
  text "VCC" at 49.3,16.95 h1.2 r90
  text "TXD" at 51.8,16.95 h1.2 r90
  text "TXD" at 54.55,16.95 h1.2 r90
  text "GND" at 57.05,16.95 h1.2 r90
  text "DIO" at 59.55,16.95 h1.2 r90
  text "CLK" at 62.05,16.95 h1.2 r90
  text "RST" at 64.8,16.95 h1.2 r90
  text "(c) GBL 2024" at 74.75,16.75 h2
  text "OK" at 5.55,13.95 h1.2 r90
  text "+" at 84.8,8.217 h5
Bottom Overlay:
  text "+" at 83.05,20.217 h5
  text "+" at 84.8,8.217 h5

## Dimensions
0,0 to 3.5,62 on Mechanical 1
0,0 to 90,0 on Mechanical 1

## Text inside footprints (layer, text, board x,y; h text height)
BZ1: Top Overlay "+" at 4.65,23.95 h2 r270; Mechanical 7 "BUZZER" at 10.25,26.5 h0.9 r90; Mechanical 7 "+" at 7.275,22.525 h0.9 r270
D1: Top Overlay "+" at 84.25,32.75 h1.5 r270